# Altium PCB Power for Master.PcbDoc
Units mm, origin at the board's own origin, x right, y up, seen from the top; angles counter-clockwise.
Board outline 41.15 x 62.23 mm, 2 copper layers (Top Layer, Bottom Layer); 6 components, 4 nets, 32 pads, 0 vias.
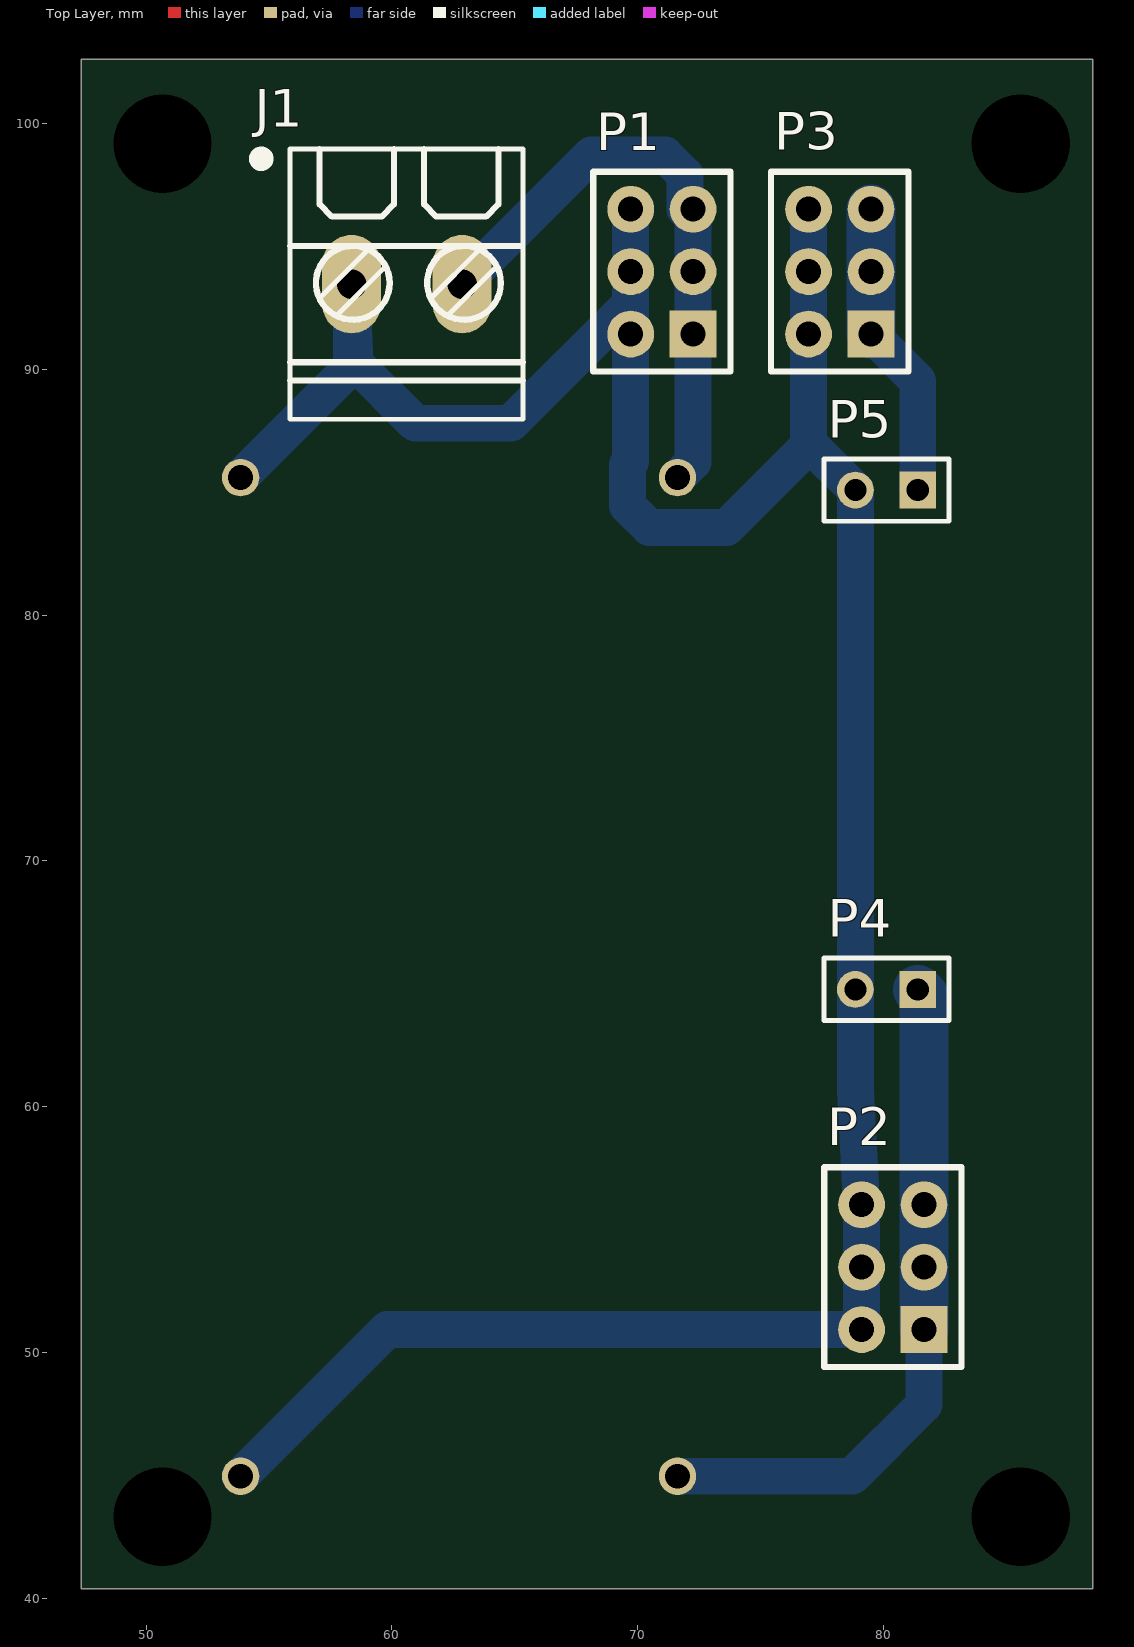
[diagram p0: Top Layer view]
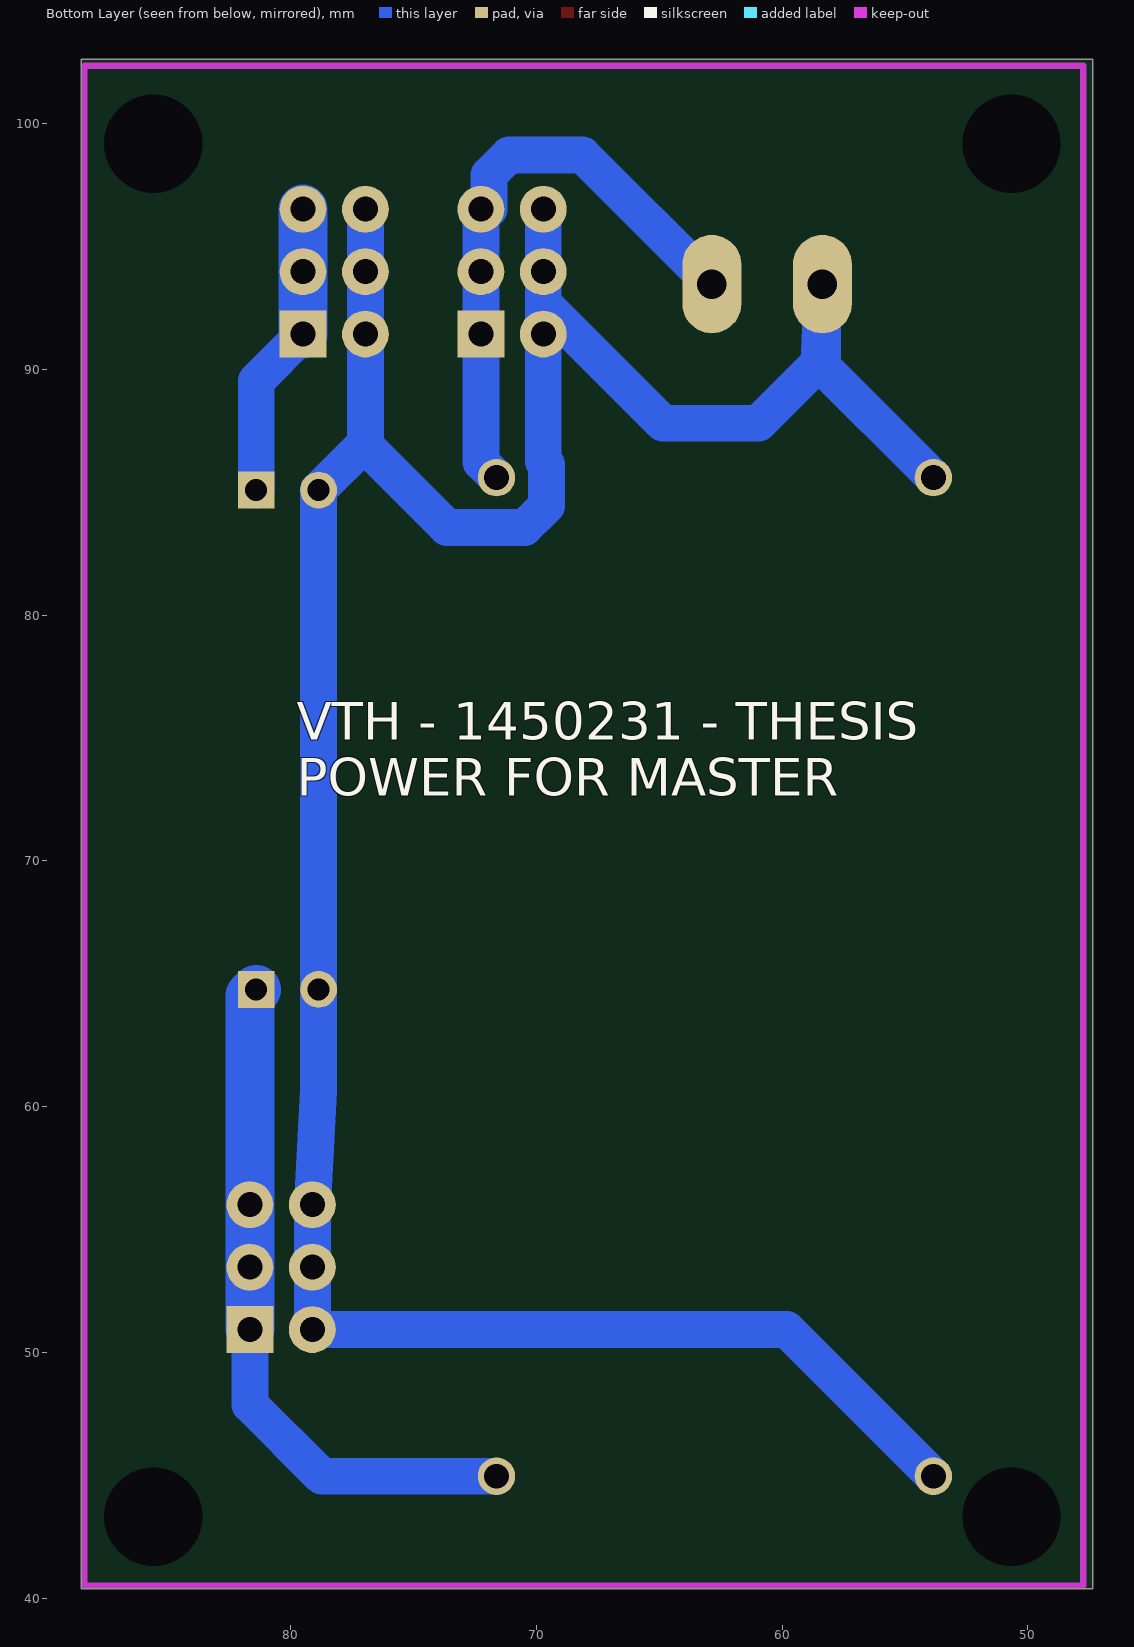
[diagram p1: Bottom Layer view, seen from below]
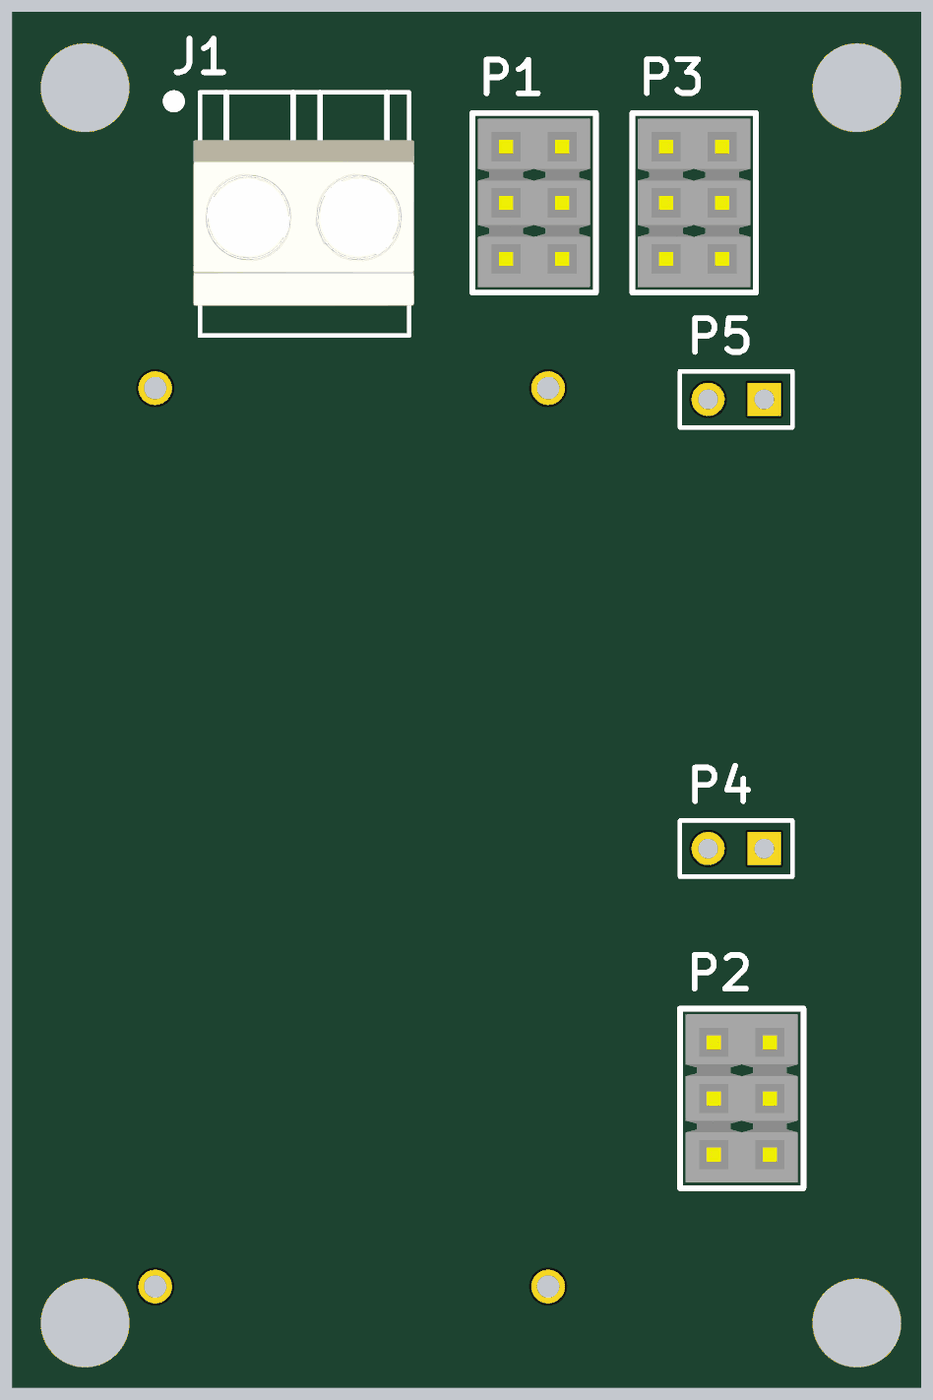
[diagram p2: 3D render of the assembled board from above, using the file's embedded part models]

## Layer stack, top to bottom
Top Solder: solder mask 0.0102, Solder Resist, Dk 3.5
Top Layer: signal copper 0.0356
Dielectric 1: dielectric 0.32, FR-4, Dk 4.8
Bottom Layer: signal copper 0.0356
Bottom Solder: solder mask 0.0102, Solder Resist, Dk 3.5

## Board outline
47.371,40.386 88.519,40.386 88.519,102.616 47.371,102.616

## Design rules (kind name [scope] priority, off if disabled: settings)
Clearance [All] p1: gap=0.5 ignorepadtopadclearanceinfootprint=FALSE
PolygonConnect [All] p1: connectstyle=Relief reliefconductorwidth=1 reliefentries=4 polygonreliefangle="90 Angle" airgapwidth=0.75
RoutingLayers [All] p1: top layer_v5=FALSE bottom layer_v5=TRUE
RoutingVias [All] p1: holewidth=0.711 width=1.27 viastyle="Through Hole" minholewidth=0.711 minwidth=1.27 maxholewidth=0.711 maxwidth=1.27
SolderMaskExpansion [All] p1: expansion=0.102
Width [All] p1: maxlimit=3 minlimit=0.5 preferedwidth=1.5
29 further rules are at their usual default settings.

## Classes and differential pairs
component class "Power for Master": J1 P2 P3 P4 P5

## Components (designator, comment, footprint, x,y, rotation, side; value= is the part's Value field where it differs from the comment)
J1 "CON.Domino2" "Domino 2M" 65.34,87.972 r90 top
P1 "Header 3x2" "Header 3x2" 72.263,91.44 r90 top
P2 "Header 3x2" "Header 3x2" 81.661,50.927 r90 top
P3 "Header 3x2" "Header 3x2" 79.502,91.44 r90 top
P4 "Header 2" HDR1X2 81.407,64.77 r180 top
P5 "Header 2" HDR1X2 81.407,85.09 r180 top

## Footprints (in the part's own frame and the unit in brackets; to place one, negate y for a bottom-side part, rotate by r counter-clockwise, add the part's x,y. Pads: shape width x height; smd on the part's side, far side on the other; paste and mask are expansions set on the pad)
"Domino 2M" [mm]
  oval 4x2.4 hole 1.2: 1(5.5,6.975) 2(5.5,2.475)
  silkscreen extent 0,0 11,10.9, body extent 1.35,-0.22 8.85,9.78, height 10
HDR1X2 [mm] "Connector; Header; 2 Position"
  rect 1.5x1.5 hole 0.9: 1(0,0)
  round 1.5 hole 0.9: 2(2.54,0)
  silkscreen extent -1.27,-1.27 3.81,1.27
"Header 3x2" [mil] "Connector; Header; 6 Position; 2 Row; Solder Pad 35mil"
  rect 75x75 hole 40: 1(0,0)
  round 75 hole 40: 2(0,100) 3(100,0) 4(100,100) 5(200,0) 6(200,100)
  silkscreen extent -60,-60 260,160, body extent -50,-50 250,150, height 83

## Part data
J1: "2 pins Domino Header", ComponentLink1Description="Digikey Part link", ComponentLink2Description="Open DataSheet", ComponentLink2URL=H:\LIBRARY\LIBRARY.Datasheet\, Price=2000VND, Publisher="Hoang Nguyen"
P1 P2 P3: "Header, 6-Pin, 2-Row", LatestRevisionDate=17-Jul-2002, LatestRevisionNote="Re-released for DXP Platform.", Publisher="Altium Limited"
P4 P5: "Header, 2-Pin", LatestRevisionDate=17-Jul-2002, LatestRevisionNote="Re-released for DXP Platform.", Publisher="Altium Limited"

## Free pads (board coordinates)
  round 1.524 hole 1.016: 1(53.848,85.598) 2(71.628,85.598) 4(53.848,44.958) 5(71.628,44.958)
  round 1.524 hole 4: 6(85.598,99.187) 7(50.673,99.187) 8(50.673,43.307) 9(85.598,43.307)

## Nets (pads, with @x,y where several pads share a name; then routed paths per layer and width w, separated by ;. In a path a pad name is that pad's centre, name@x,y a point inside that pad or via, vN(x,y) a via of type N, cw(c..) or ccw(c..) an arc to the next point about the centre after c; other vN are vias at no path point)
3V3: P3.1 P3.3 P3.5 P5.1 | length 12.2
  Bottom Layer w1.5: P3.1 81.407,89.535 P5.1
  Bottom Layer w2: P3.1 P3.3 P3.5
5V: P2.1 P2.3 P2.5 P4.1 pad.5 | length 28.2
  Bottom Layer w1.5: pad.5 78.74,44.958 81.661,47.879 P2.1
  Bottom Layer w2: P4.1 81.661,64.516 P2.5 P2.3 P2.1
12V: J1.2 P1.1 P1.3 P1.5 pad.2 | length 24.5
  Bottom Layer w1.5: J1.2 68.123,98.73 71.12,98.73 71.933,97.917 71.933,96.52 P1.5 P1.3 P1.1 72.263,86.233 pad.2
GND: J1.1 P1.2 P1.4 P1.6 P2.2 P2.4 P2.6 P3.2 P3.4 P3.6 P4.2 P5.2 pad.1 pad.4 | length 122.8
  Bottom Layer w1.5: pad.4 59.817,50.927 P2.2 P2.4 P2.6 78.867,60.655 P4.2 P5.2 76.962,86.995 ; pad.1 58.509,90.259 ; P1.6 P1.4 69.723,92.71 69.723,92.685 ; P3.6 P3.4 P3.2 76.962,86.995 ; 58.509,90.259 60.96,87.808 64.846,87.808 69.723,92.685 ; 58.509,90.259 58.365,90.403 J1.1 58.509,90.259 ; 69.723,92.685 P1.2 69.723,86.258 69.596,86.131 69.596,84.455 70.485,83.566 73.635,83.566 76.962,86.893 76.962,86.995

## Keep-outs
Bottom Layer:
  lines w0.254: 47.752,40.513 47.752,102.362 88.392,102.362 88.392,40.513 47.752,40.513

## Silkscreen, mask and mechanical layers (free items; w line width, h text height)
Bottom Overlay:
  text "VTH - 1450231 - THESIS / POWER FOR MASTER" at 79.756,72.644 h1.52